# Altium PCB PCB LV.PcbDoc
Units mm, origin at the board's own origin, x right, y up, seen from the top; angles counter-clockwise.
Board outline 41.28 x 38.57 mm, 4 copper layers (L1 (Signal), L2 (GND), L3 (GND), L4 (signal)), stack 1.57 mm thick; 35 components, 27 nets, 172 pads, 140 vias.
Unrouted connection lines stored in the file: 2.
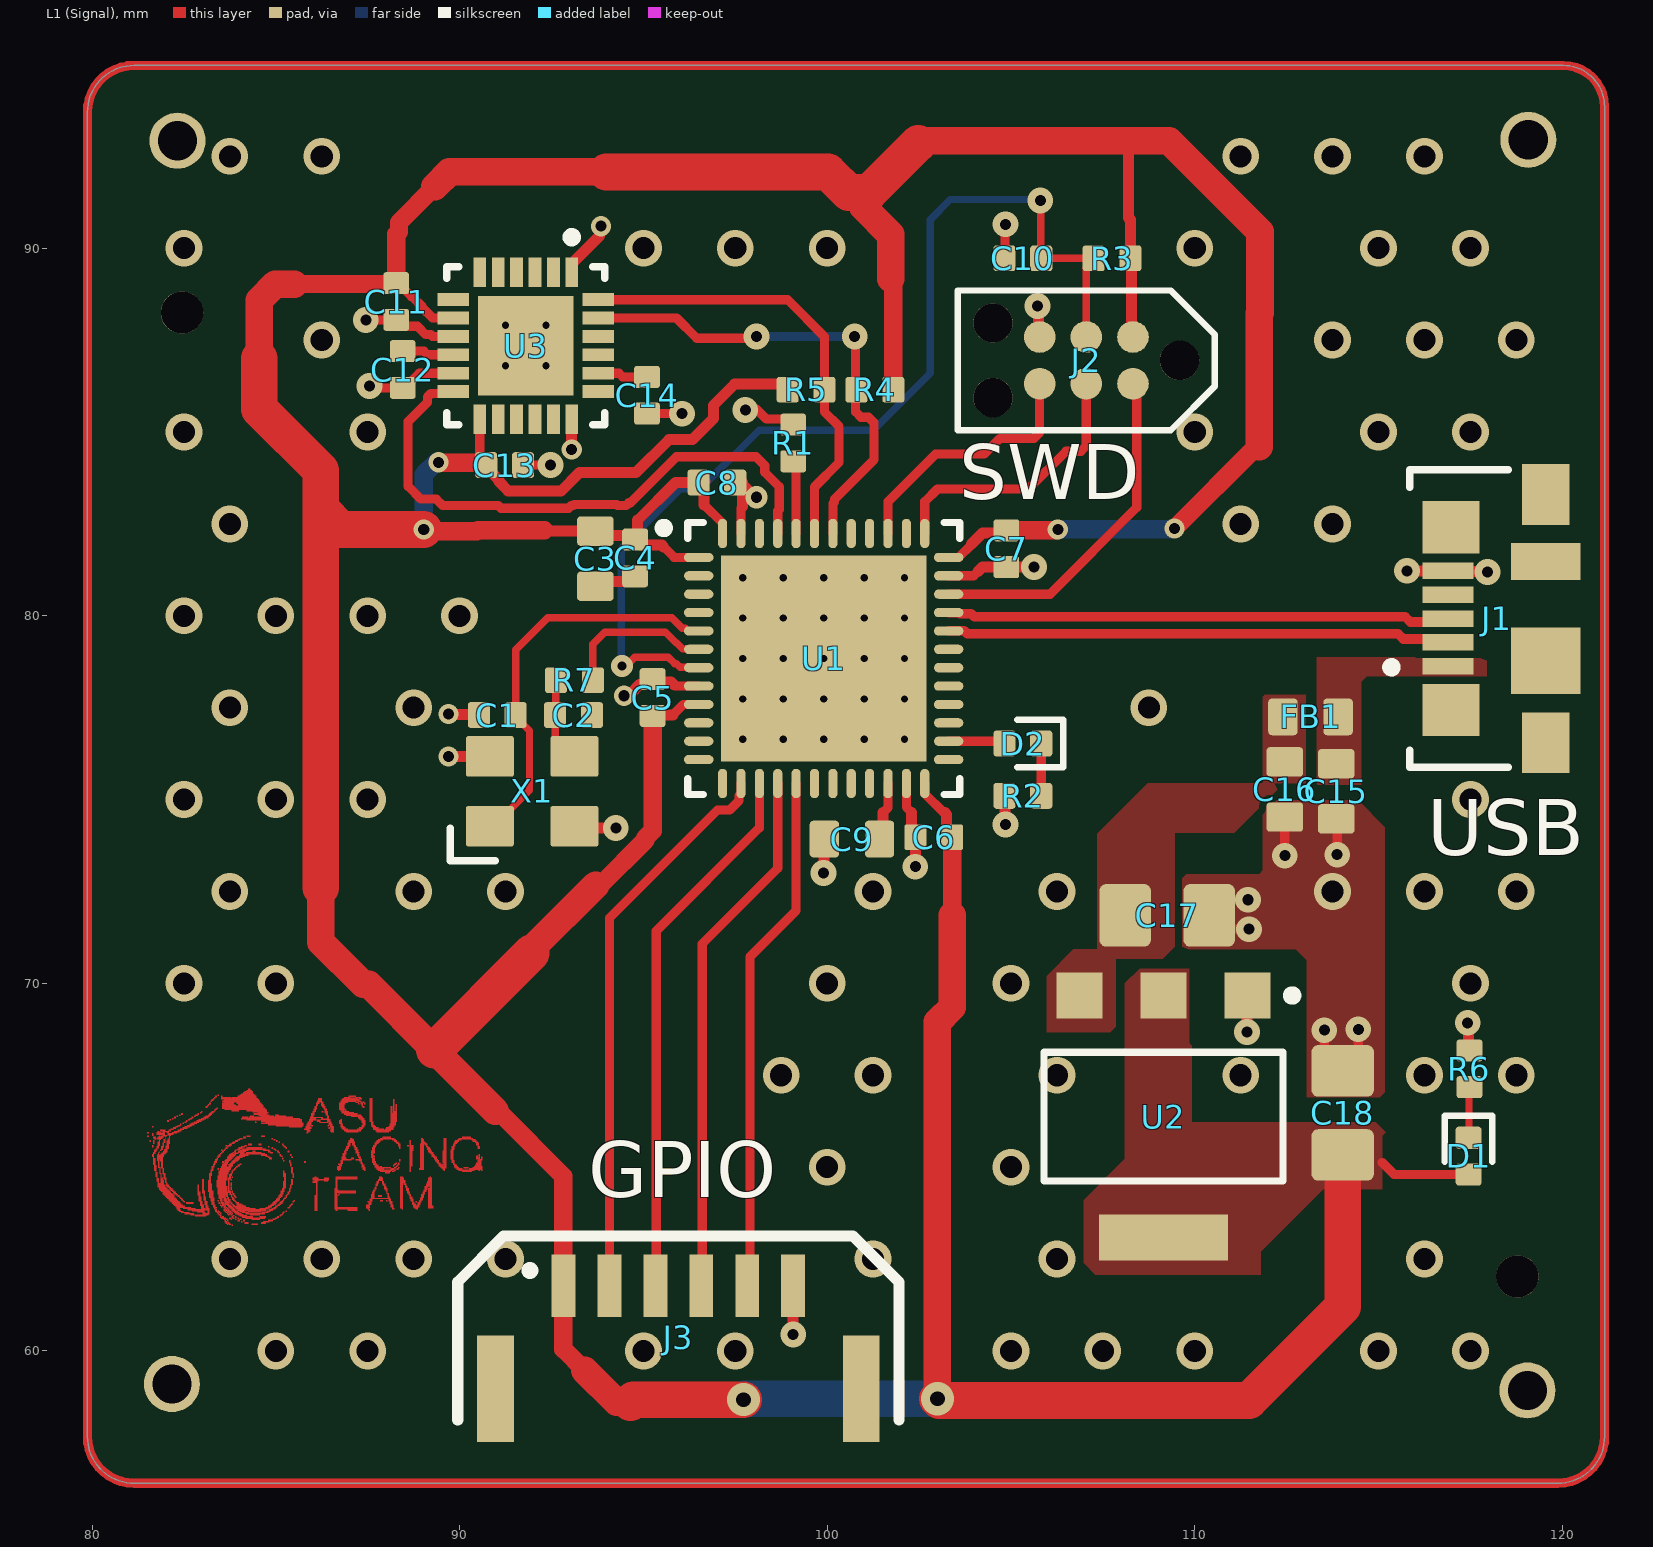
[diagram p0: L1 (Signal) view]
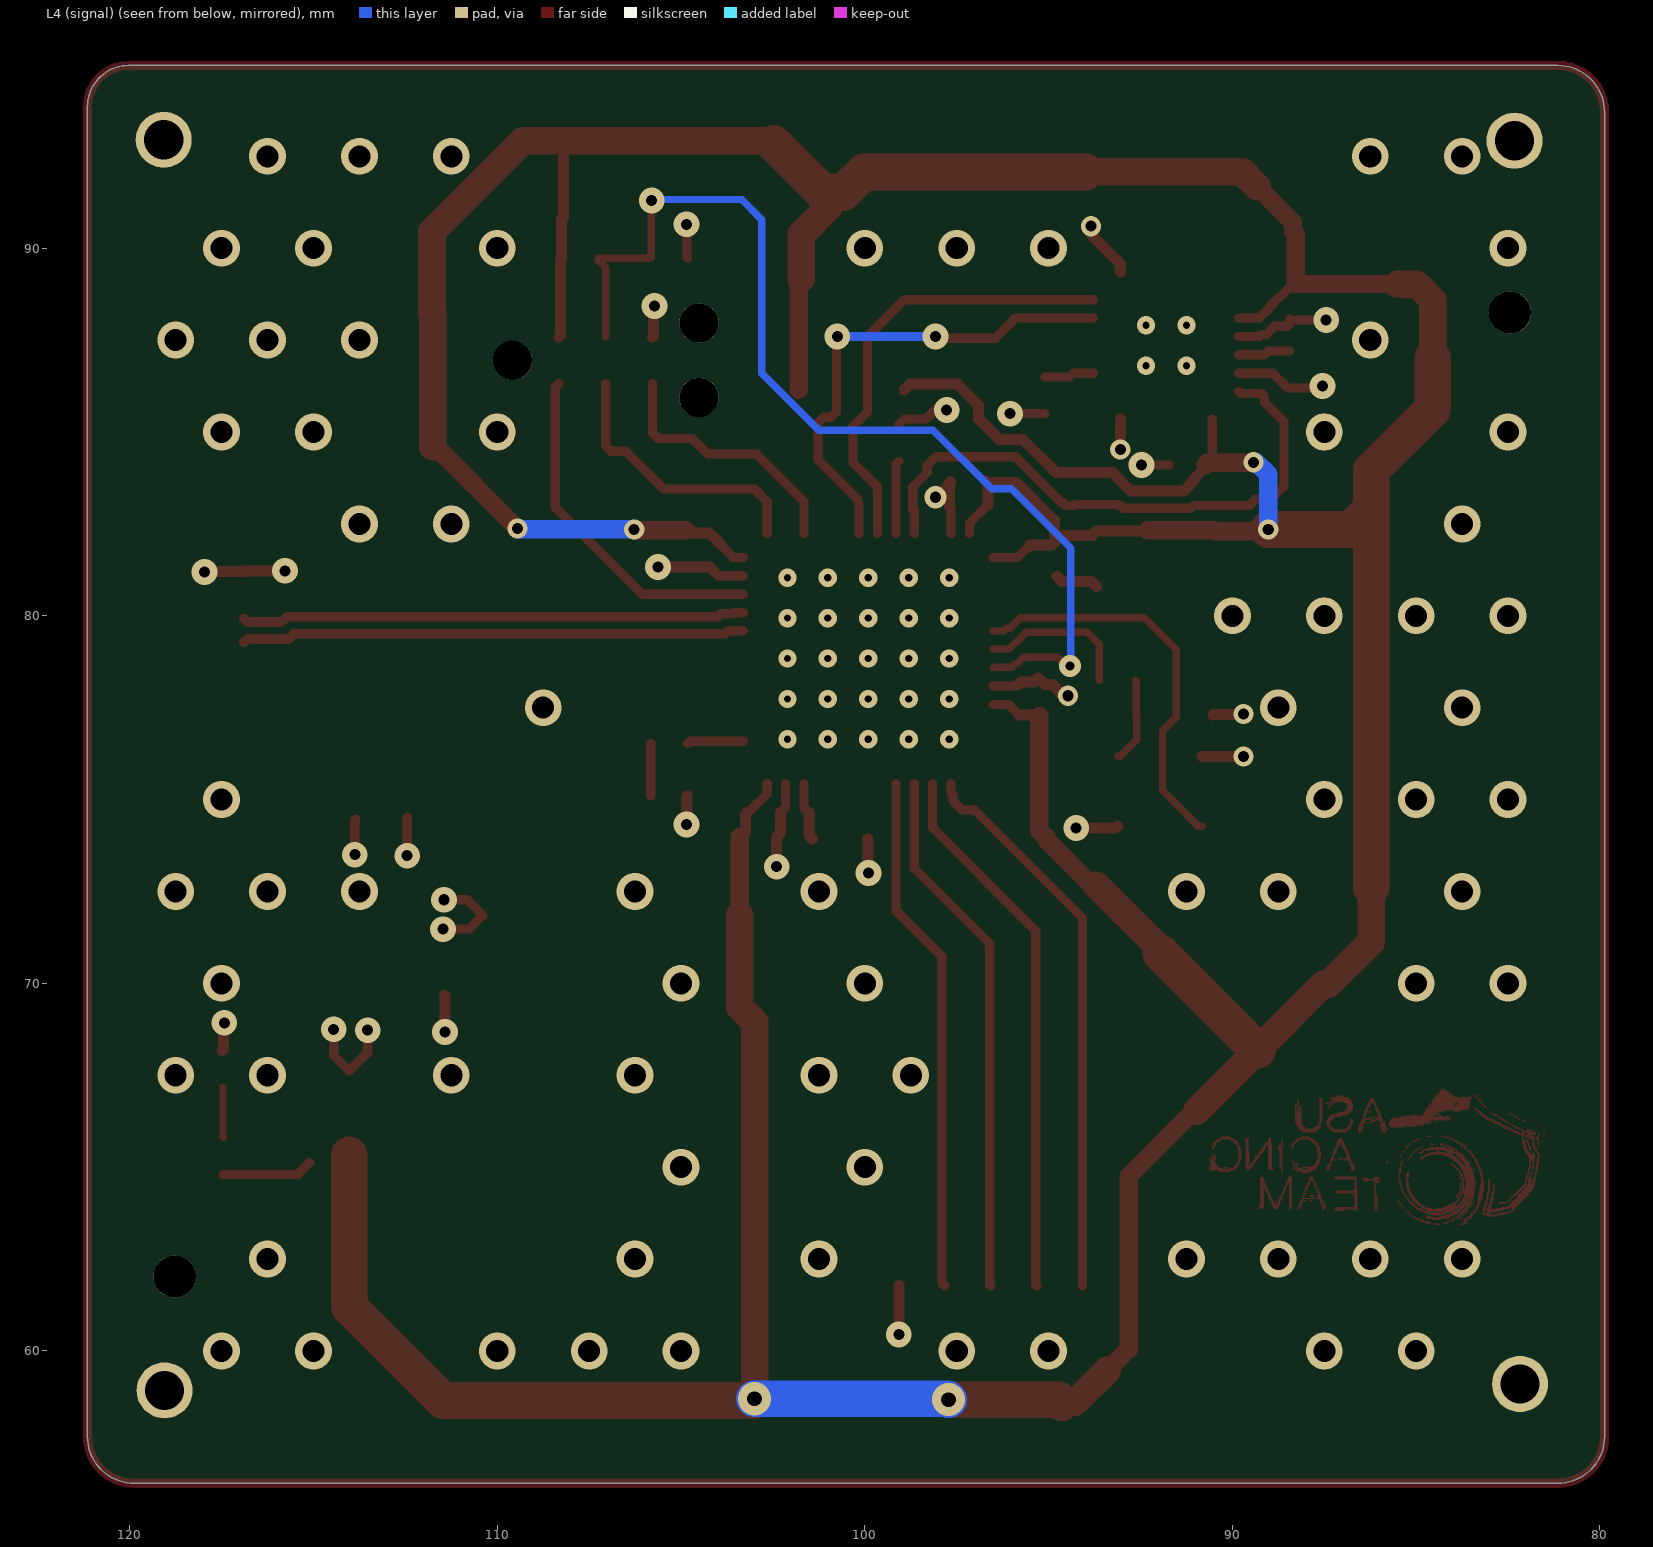
[diagram p1: L4 (signal) view, seen from below]
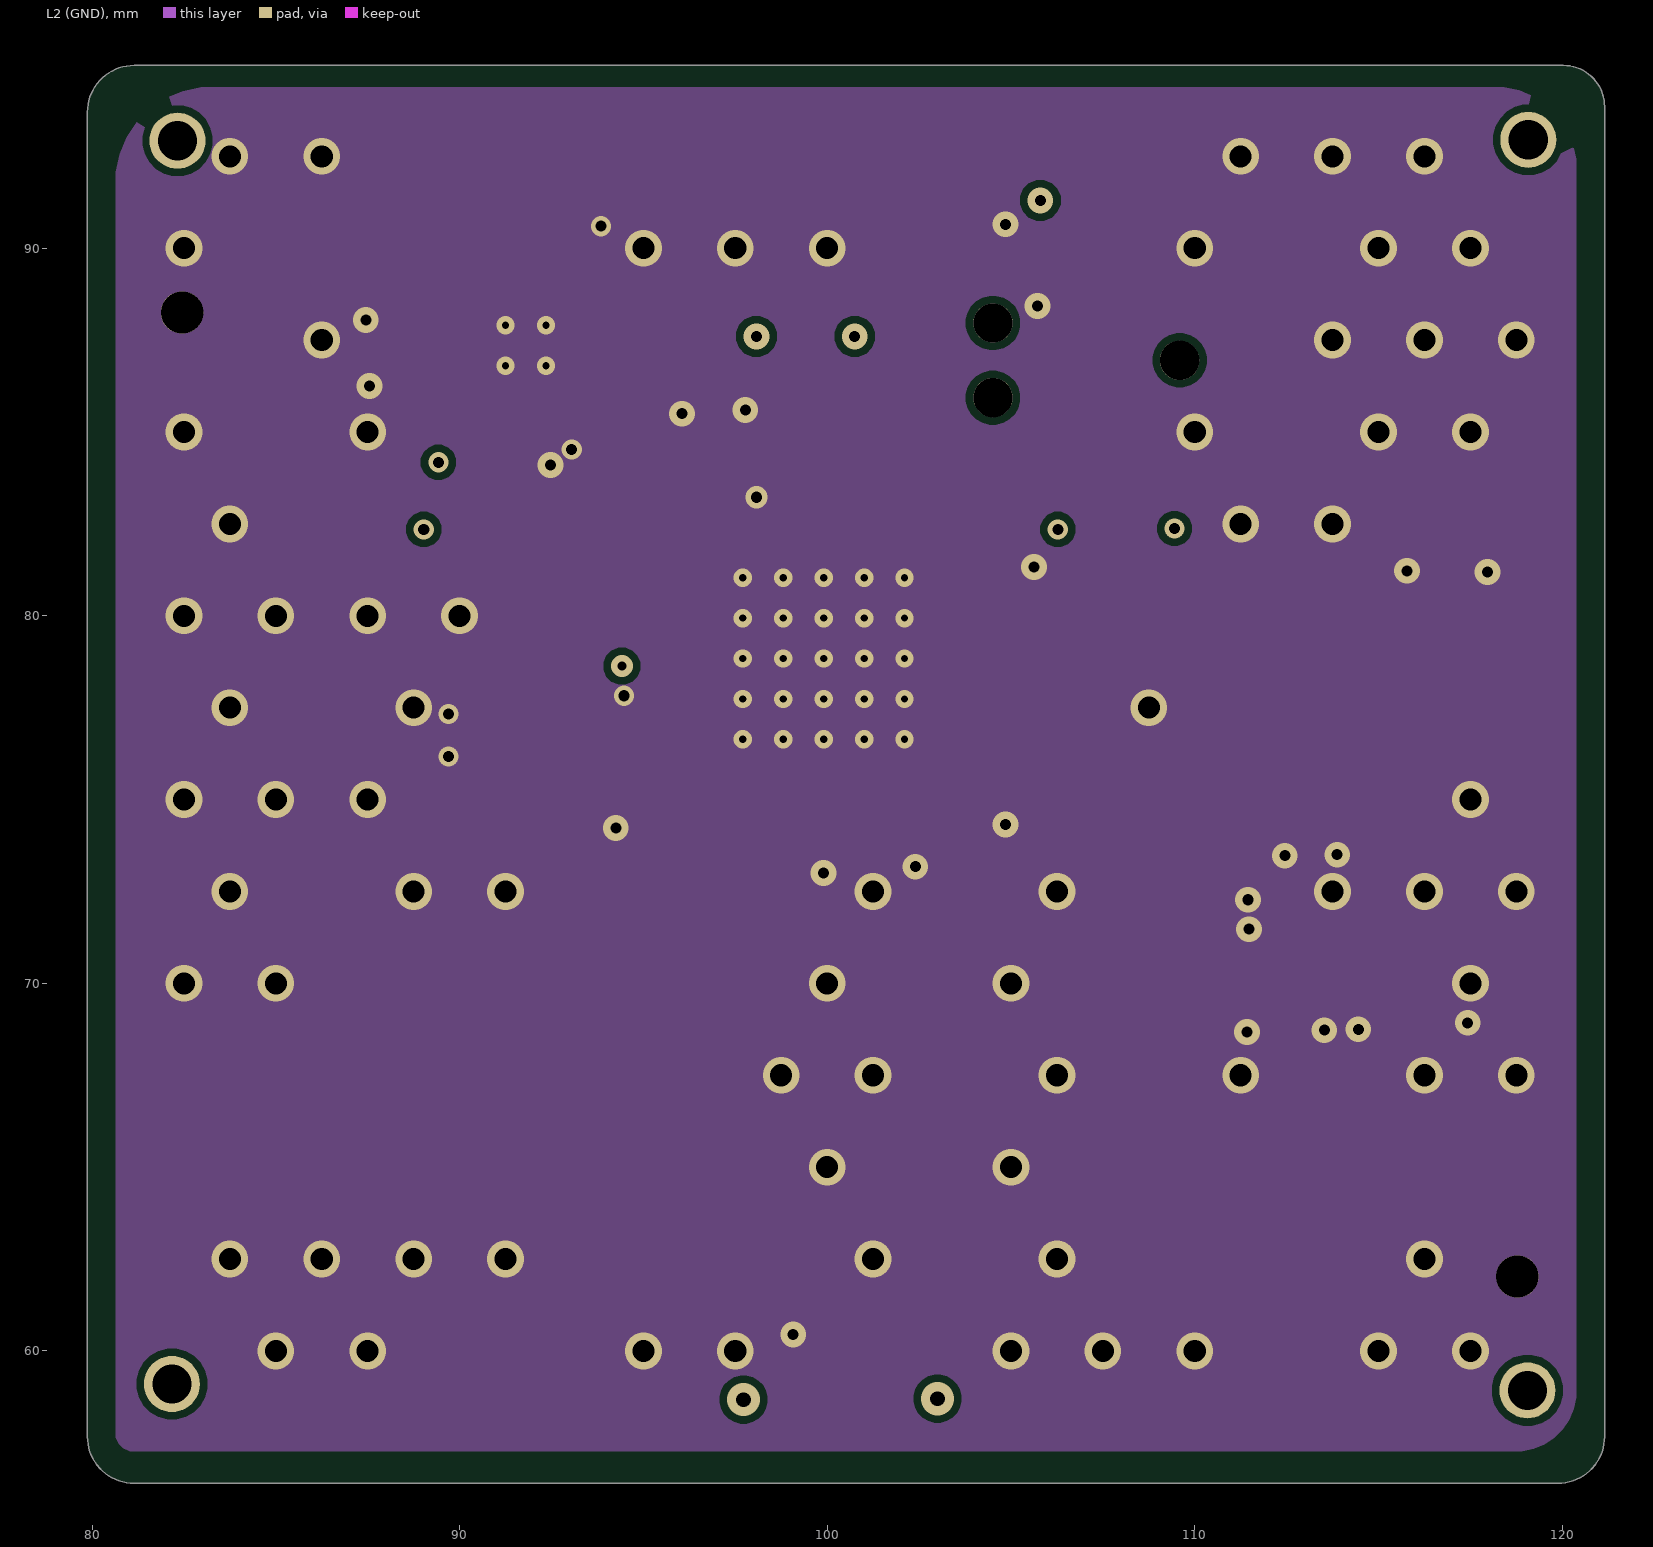
[diagram p2: L2 (GND)]
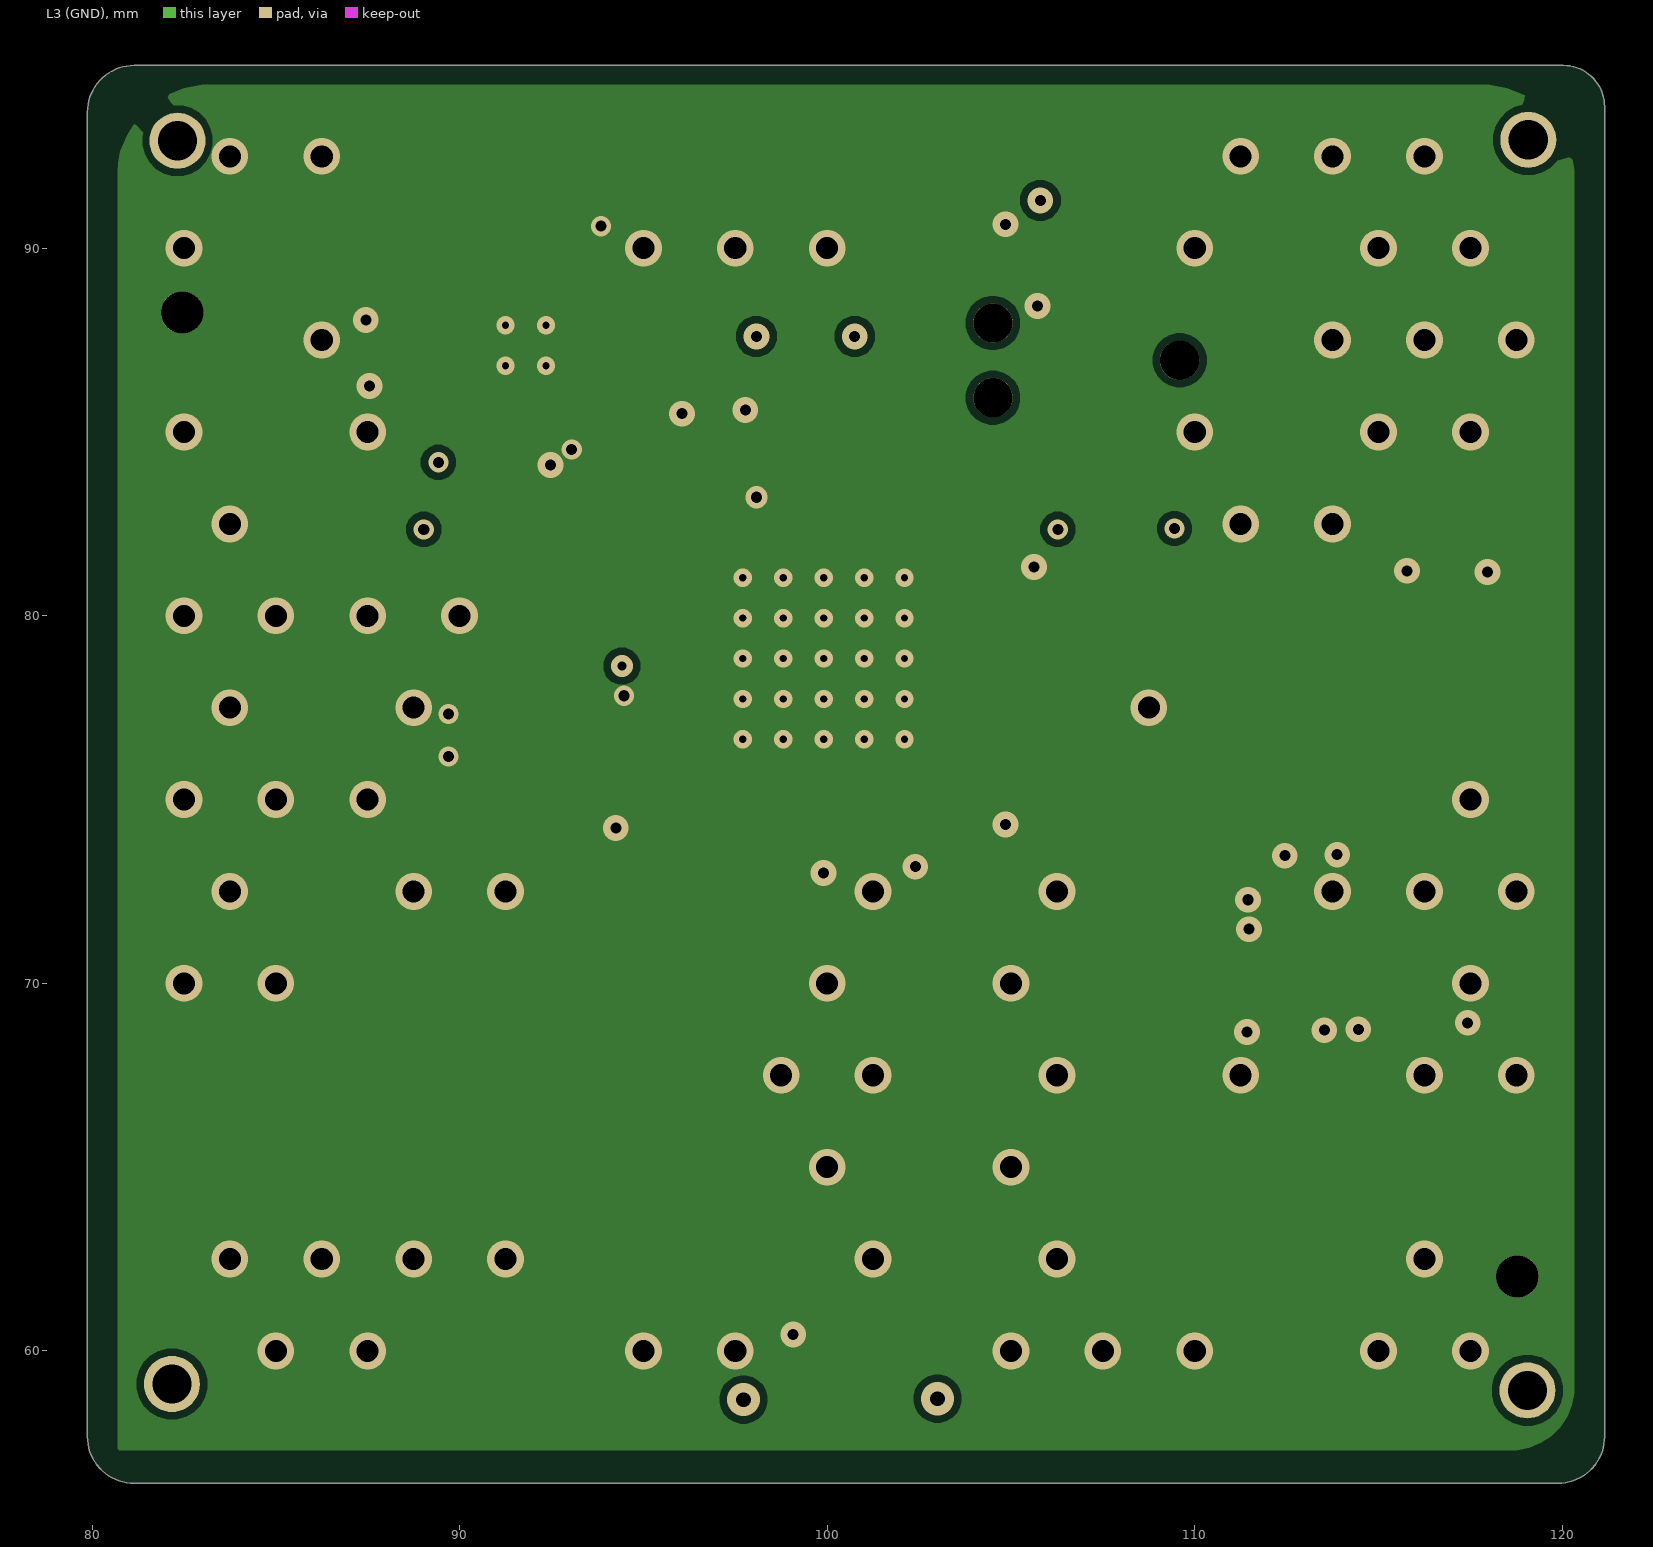
[diagram p3: L3 (GND)]
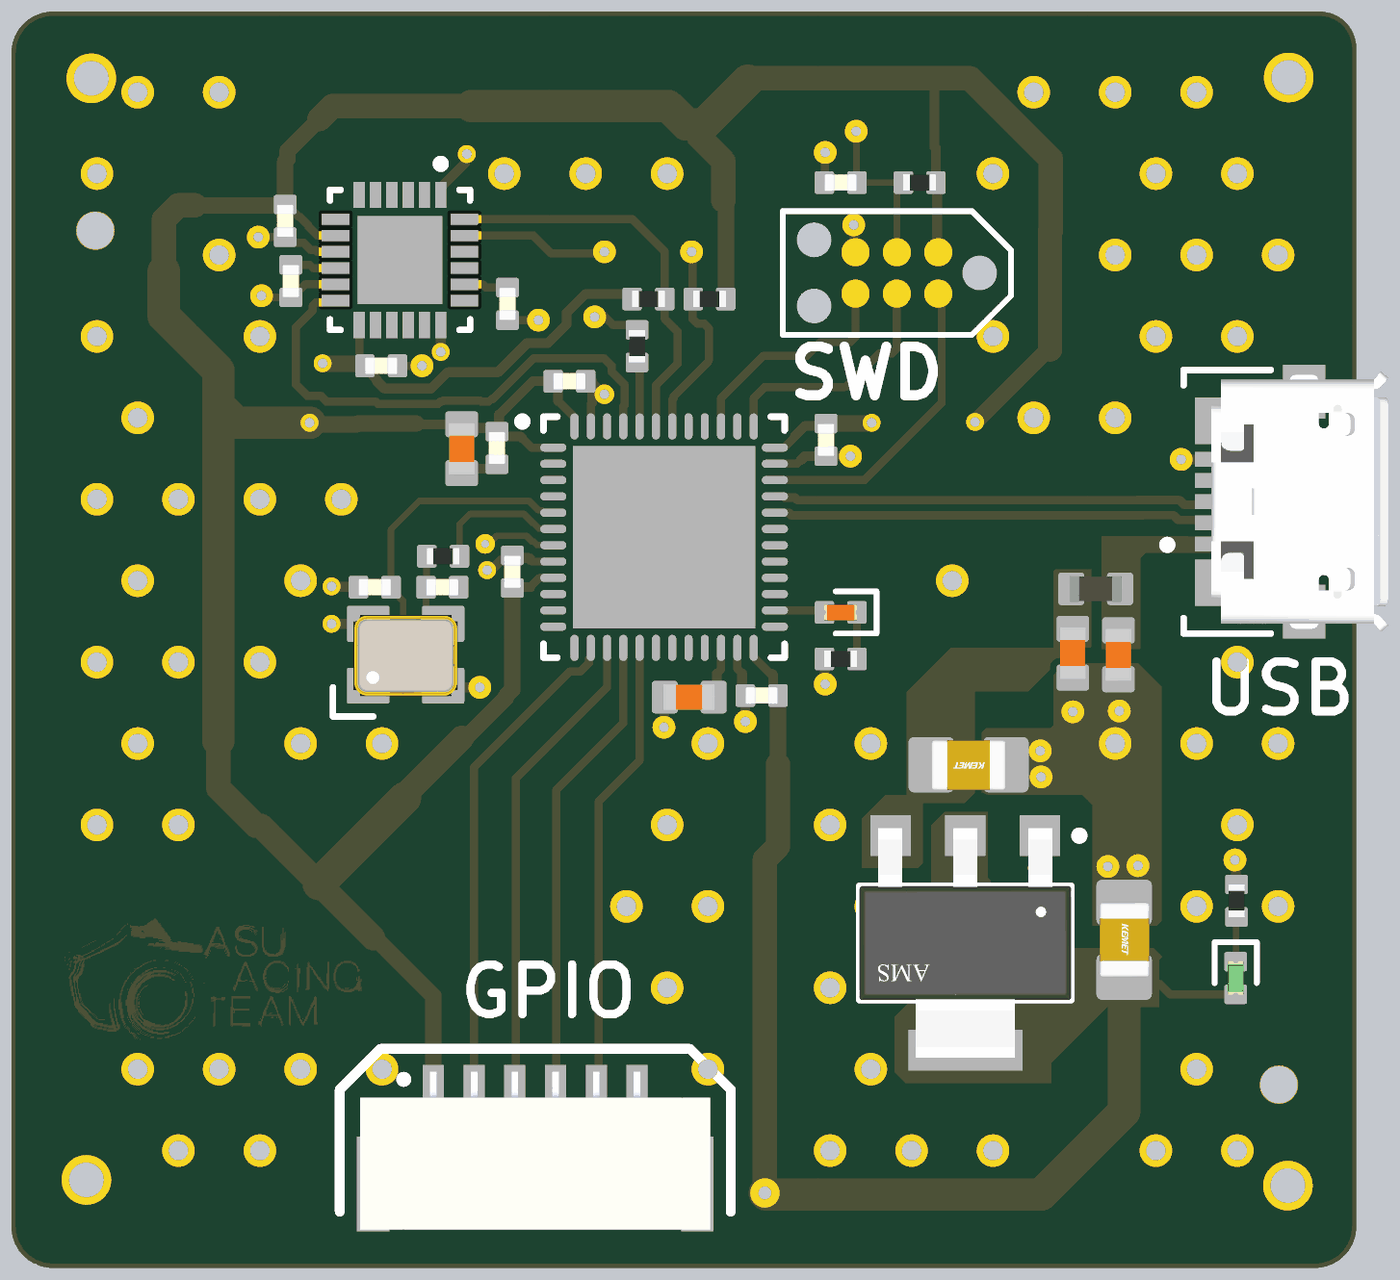
[diagram p4: 3D render of the assembled board from above, using the file's embedded part models]

## Layer stack, top to bottom
Top Solder: solder mask 0.0254, SM-001, Dk 4
L1 (Signal): signal copper 0.035
Dielectric 1: prepreg 0.2, PP-017, Dk 4.6
L2 (GND): signal copper 0.0175
Dielectric 3: core 1.065, Core-039, Dk 4.6
L3 (GND): signal copper 0.0175
Dielectric 5: prepreg 0.2, PP-017, Dk 4.6
L4 (signal): signal copper 0.035
Bottom Solder: solder mask 0.0254, SM-001, Dk 4

## Board outline
79.875,57.67 ccw(c81.145,57.67) 81.145,56.4 119.88,56.4 ccw(c119.88,57.67) 121.15,57.67 121.15,93.85 ccw(c120.027,93.85) 120.027,94.973 81.145,94.973 ccw(c81.145,93.703) 79.875,93.703

## Design rules (kind name [scope] priority, off if disabled: settings)
Clearance [All] p1: gap=0.2 ignorepadtopadclearanceinfootprint=FALSE
DiffPairsRouting [All] p1: maxlimit=0.254 minlimit=0.203 mostfreqgap=0.254 toplayer_maxgap=0.203 toplayer_prefgap=0.203 toplayer_minwidth=0.26 toplayer_maxwidth=0.26 toplayer_prefwidth=0.26 bottomlayer_maxgap=0.203 bottomlayer_prefgap=0.203 bottomlayer_minwidth=0.26 bottomlayer_maxwidth=0.26 bottomlayer_prefwidth=0.26 impedanceprofiledriven=TRUE impedanceprofileid={1E24B15E-7071-4784-B288-BCCDF5F66E81} impedanceprofilevalue=90.000000 maxuncoupledlength=12.7
PolygonConnect [All] p1: connectstyle=Direct reliefconductorwidth=0.254 reliefentries=4 polygonreliefangle="90 Angle" airgapwidth=0.254
RoutingVias [All] p1: holewidth=0.3 width=0.7 viastyle="Through Hole" minholewidth=0.25 minwidth=0.55 maxholewidth=0.4 maxwidth=0.9
SolderMaskExpansion [All] p1: expansion=0 istentingtop=FALSE
SupplyNets "Schematic Supply Nets_3" [InNet('VBUS')] p1: voltage=0.000
SupplyNets "Schematic Supply Nets_2" [InNet('+3V3')] p2: voltage=0.000
SupplyNets "Schematic Supply Nets_1" [InNet('GND')] p3: voltage=0.000
SupplyNets "Schematic Supply Nets" [InNet('+5')] p4: voltage=0.000
UnRoutedNet [All] p1: checkbadconnections=TRUE
Width [All] p1: maxlimit=1 minlimit=0.2 preferedwidth=0.3 midlayer1_minwidth=0.254 midlayer1_maxwidth=0.254 midlayer1_prefwidth=0.254 midlayer2_minwidth=0.254 midlayer2_maxwidth=0.254 midlayer2_prefwidth=0.254 minimp=50.000000 maximp=50.000000 favimp=50.000000
28 further rules are at their usual default settings.

## Classes and differential pairs
differential pair class USB_PAIR: USB_D
differential pair USB_D: +USB_D_P -USB_D_N

## Components (designator, comment, footprint, x,y, rotation, side; value= is the part's Value field where it differs from the comment)
C1 "10p" CAP_0402 91.025,77.3 r0 top
C2 "10p" CAP_0402 93.1,77.3 r180 top
C3 "2.2u" CAP_0603 93.694,81.553 r90 top
C4 "100n" CAP_0402 94.775,81.575 r90 top
C5 "100n" CAP_0402 95.25,77.775 r270 top
C6 "100n" CAP_0402 102.9,73.975 r0 top
C7 "100n" CAP_0402 104.875,81.825 r90 top
C8 "100n" CAP_0402 97,83.625 r180 top
C9 "2u2" CAP_0603 100.675,73.925 r0 top
C10 "100n" CAP_0402 105.325,89.725 r0 top
C11 "100n" CAP_0402 88.275,88.55 r90 top
C12 "100n" CAP_0402 88.45,86.7 r90 top
C13 "10n" CAP_0402 91.225,84.1 r180 top
C14 "2n2" CAP_0402 95.1,86 r90 top
C15 "2.2u" CAP_0603 113.85,75.225 r90 top
C16 "2.2u" CAP_0603 112.45,75.275 r90 top
C17 "22u" CAP_0805 109.25,71.85 r180 top
C18 "22u" CAP_0805 114.025,66.475 r270 top
D1 "GREEN" LED_0402_GREEN 117.45,65.3 r90 top
D2 "RED" LED_0402_RED 105.325,76.525 r0 top
FB1 "120R" FB_0603 113.15,77.25 r180 top
J1 "473460001" FP-473460001-MFG 119.2,79.925 r90 top
J2 "TC2030-NL" TC2030-NL-FP 107.05,86.95 r180 top
J3 "SM06B-GHS-TB" SM06B-GHS-TB 95.95,60.375 r0 top
R1 "10k" RES_0402 99.075,84.7 r270 top
R2 "1k" RES_0402 105.325,75.1 r180 top
R3 "10k" RES_0402 107.75,89.725 r0 top
R4 "1k" RES_0402 101.3,86.15 r180 top
R5 "1k" RES_0402 99.425,86.15 r0 top
R6 "1k" RES_0402 117.475,67.675 r270 top
R7 "0R" RES_0402 93.125,78.25 r180 top
U1 "STM32F411CEU6" STM-UFQFPN48_L 99.905,78.838 r0 top
U2 "AMS1117-3.3" FP-AMS1117-IPC_C 109.15,66.375 r270 top
U3 "MPU-6050" IS-QFN-24_V 91.8,87.35 r270 top
X1 "24MHz" XTAL_3225 91.975,75.225 r0 top

## Footprints (in the part's own frame and the unit in brackets; to place one, negate y for a bottom-side part, rotate by r counter-clockwise, add the part's x,y. Pads: shape width x height; smd on the part's side, far side on the other; paste and mask are expansions set on the pad)
CAP_0402 [mm]
  rrect25% 0.6x0.7 smd: 1(-0.5,0) 2(0.5,0)
  body extent -0.5,-0.26 0.5,0.26, height 0.37
CAP_0603 [mm]
  rrect25% 0.8x1 smd: 1(-0.75,0) 2(0.75,0)
  body extent -0.8,-0.4 0.8,0.4, height 0.51
CAP_0805 [mm]
  rrect25% 1.4x1.7 smd: 1(-1.143,0) 2(1.143,0)
  body extent -1.15,-0.76 1.15,0.79, height 1.01
FB_0603 [mm]
  rrect25% 0.8x1 smd: 1(-0.75,0) 2(0.75,0)
  body extent -0.8,-0.4 0.8,0.4, height 0.81
FP-473460001-MFG [mm]
  rect 0.45x1.38 smd paste+0 mask+0: 1(-1.3,2.31) 2(-0.65,2.31) 3(0,2.31) 4(0.65,2.31) 5(1.3,2.31)
  rect 1.425x1.55 smd paste+0 mask+0: 6(-2.488,2.225) 7(2.488,2.225)
  rect 1.65x1.3 smd paste+0 mask+0: 8(-3.375,-0.35) 11(3.375,-0.35)
  rect 1.8x1.9 smd paste+0 mask+0: 9(-1.15,-0.35)
  rect 1x1.9 smd paste+0 mask+0: 10(1.55,-0.35)
  silkscreen extent -4.05,0.67 4.05,3.97, body extent -4.3,-2.48 4.3,3.45, height 0.25
FP-AMS1117-IPC_C [mm]
  rect 1.25x1.25 smd paste+0 mask+0: 1(-3.295,2.29) 2(-3.295,0) 3(-3.295,-2.29)
  rect 1.25x3.5 smd paste+0 mask+0: 4(3.295,0)
  silkscreen extent -3.42,-3.25 1.75,3.63, body extent -3.9,-3.35 3.9,3.35, height 0.25
IS-QFN-24_V [mm] "QFN, 24-Leads, Body 4x4mm, Pitch 0.5mm, Thermal Pad 2.7x2.6mm"
  rect 0.8x0.35 smd: 1(-2,1.25) 2(-2,0.75) 3(-2,0.25) 4(-2,-0.25) 5(-2,-0.75) 6(-2,-1.25) 13(2,-1.25) 14(2,-0.75) 15(2,-0.25) 16(2,0.25) 17(2,0.75) 18(2,1.25)
  rect 0.35x0.85 smd mask+0.102: 7(-1.25,-1.975) 8(-0.75,-1.975) 9(-0.25,-1.975) 10(0.25,-1.975) 11(0.75,-1.975) 12(1.25,-1.975) 19(1.25,1.975) 20(0.75,1.975) 21(0.25,1.975) 22(-0.25,1.975) 23(-0.75,1.975) 24(-1.25,1.975)
  rect 2.7x2.6 smd: 25(0,0)
  silkscreen extent -3.07,-2.15 2.15,2.15, body extent -2,-2 2,2, height 0.95
LED_0402_GREEN [mm]
  rrect25% 0.6x0.7 smd: A(-0.5,0) K(0.5,0)
  silkscreen extent -0.15,-0.65 1.1,0.65, body extent -0.51,-0.25 0.51,0.25, height 0.45
LED_0402_RED [mm]
  rrect25% 0.6x0.7 smd: A(-0.5,0) K(0.5,0)
  silkscreen extent -0.15,-0.65 1.1,0.65, body extent -0.51,-0.25 0.51,0.25, height 0.45
RES_0402 [mm]
  rrect25% 0.6x0.7 smd: 1(-0.5,0) 2(0.5,0)
  body extent -0.5,-0.25 0.5,0.25, height 0.3
SM06B-GHS-TB [mm]
  rect 0.65x1.7 smd: 1(-3.125,1.4) 2(-1.875,1.4) 3(-0.625,1.4) 4(0.625,1.4) 5(1.875,1.4) 6(3.125,1.4)
  rect 1x2.9 smd: ""(-4.975,-1.4) ""(4.975,-1.4)
  silkscreen extent -6,-2.25 6,2.75, body extent -5.38,-2.8 5.38,2.05, height 4.26
STM-UFQFPN48_L [mm] "QFN, 48-Leads, Body 7.1x7.1mm, Pitch 0.5mm, Thermal Pad 5.6x5.6mm, IPC High Density"
  oval 0.8x0.25 smd: 1(-3.4,2.75) 2(-3.4,2.25) 3(-3.4,1.75) 4(-3.4,1.25) 5(-3.4,0.75) 6(-3.4,0.25) 7(-3.4,-0.25) 8(-3.4,-0.75) 9(-3.4,-1.25) 10(-3.4,-1.75) 11(-3.4,-2.25) 12(-3.4,-2.75) 25(3.4,-2.75) 26(3.4,-2.25) 27(3.4,-1.75) 28(3.4,-1.25) 29(3.4,-0.75) 30(3.4,-0.25) 31(3.4,0.25) 32(3.4,0.75) 33(3.4,1.25) 34(3.4,1.75) 35(3.4,2.25) 36(3.4,2.75)
  oval 0.25x0.8 smd: 13(-2.75,-3.4) 14(-2.25,-3.4) 15(-1.75,-3.4) 16(-1.25,-3.4) 17(-0.75,-3.4) 18(-0.25,-3.4) 19(0.25,-3.4) 20(0.75,-3.4) 21(1.25,-3.4) 22(1.75,-3.4) 23(2.25,-3.4) 24(2.75,-3.4) 37(2.75,3.4) 38(2.25,3.4) 39(1.75,3.4) 40(1.25,3.4) 41(0.75,3.4) 42(0.25,3.4) 43(-0.25,3.4) 44(-0.75,3.4) 45(-1.25,3.4) 46(-1.75,3.4) 47(-2.25,3.4) 48(-2.75,3.4)
  rect 5.6x5.6 smd: 49(0,0)
  silkscreen extent -4.47,-3.7 3.7,3.7, body extent -3.55,-3.55 3.55,3.55, height 0.6
TC2030-NL-FP [mil]
  round 33.98 smd paste-16.99: 1(-50,-25) 2(-50,25) 3(0,-25) 4(0,25) 5(50,-25) 6(50,25)
  round 42.01 hole 42.01 unplated: MH(-100,0) MH(100,-40) MH(100,40)
  silkscreen extent -138,-75 138,75
XTAL_3225 [mm]
  rrect10% 1.3x1.1 smd: 1(-1.15,-0.95) 2(1.15,-0.95) 3(1.15,0.95) 4(-1.15,0.95)
  silkscreen extent -2.23,-1.89 -1,-1, body extent -1.6,-1.28 1.6,1.22, height 0.61

## Part data
C1 C2 C4 C5 C6 C7 C8 C10 C11 C12 C13 C14: library part CAP_0402, "Capacitor SMD 0402"
C3 C9 C15 C16: library part CAP_0603, "Capacitor SMD 0603"
C17 C18: library part CAP_0805, "Capacitor SMD 0805"
D1: library part LED_0402_GREEN, "LED 0402 GREEN SMD"
D2: library part LED_0402_RED, "LED 0402 RED SMD"
FB1: library part FB_0603, "Ferrite Bead SMD 0603"
J1: library part CMP-2000-05246-2, "CONN RCPT USB2.0 MICRO B SMD R/A", Current Rating=1.8A, Manufacturer=Molex, Package=0, Temperature="-30°C to +85°C", Temperature Range High=+85°C, Temperature Range Low=-30°C, Voltage Rating=30V, Automotive=No, Category=Conn, ComponentLink2Description=Datasheet, ComponentLink2URL=https://www.molex.com/webdocs/datasheets/pdf/en-us/0473460001_IO_CONNECTORS.pdf, Conn Orientation="Right Angle", Contact Material=Gold,Nickel, Device Class L1=Connectors, Device Class L2="USB Connectors", Device Class L3=unset, Digikey Description="CONN RCPT USB2.0 MICRO B SMD R/A", Footprint Url=https://www.molex.com/pdm_docs/sd/473460001_sd.pdf, Height=2.945mm, Is Female=yes, Lead Free=Yes, Manufacturer Part Number=473460001, Number Of Contacts=5, Octopart=https://octopart.com/47346-0001-molex-7164928, Pitch=0.65mm, RoHS=TRUE, Shielding=true, Usb Standard="USB 2.0"
J2: "Tag-Connect No-Solder SWD Debug Connector (No Legs) DO NOT PLACE", Manufacturer=Tag-Connect, Manufacturer Part Number=TC2030-NL-FP
J3: "Header Connector 6 Position 1.25MM Pitch SMD Horizontal JST GH", Manufacturer=JST, Manufacturer Part Number=SM06B-GHS-TB
R1 R2 R3 R4 R5 R6 R7: library part RES_0402, "Resistor SMD 0402"
U1: library part CMP-0243-00165-1, "ARM Cortex-M4 32-bit MCU+FPU, 512 KB Flash, 128 KB RAM, 36 I/Os, 48-Pin UFQFPN, -40 to 85 degC, Tray", I/Os (High Current)=36, Operating Frequency(F) (Processor speed) (MHz)=100, Package Description=UFQFPN48, Package Reference="48-Pin Ultra Thin Fine Pitch Quad Flat No-Lead, 7 x 7 x 0.6 mm Body, 0.5 mm Pitch, Exposed Pad", Supply Voltage(Vcc) min (V)=1.7, ComponentLink1Description="Manufacturer URL", ComponentLink1URL=http://www.st.com/, ComponentLink2Description=Datasheet, ComponentLink2URL=http://www.st.com/st-web-ui/static/active/en/resource/technical/document/datasheet/DM00115249.pdf, Core="ARM Cortex-M4", DatasheetVersion="Rev. 6", FLASH Size (Prog) (kB)=512, Internal RAM Size (kB)=128, Mounting Technology="Surface Mount", Packing=Tray
U2: library part CMP-209535-000001-1, "LDO Voltage Regulators 1A, 3.3V", Dropout Voltage=1.1V, Manufacturer="Advanced Monolithic Systems", Max Junction Temp=+125°C, Max Power Dissipation=1.2W, Max Supply Voltage=15V, Nominal Supply Current=5mA, Output Current=1A, Output Voltage=3.3V, Package=AMS1117, Temperature="-40°C to +125°C", Temperature Range Low=-40°C, Automotive=No, Category=IC, ComponentLink2Description=Datasheet, ComponentLink2URL=http://www.advanced-monolithic.com/pdf/ds1117.pdf, Device Class L1="Integrated Circuits (ICs)", Device Class L2="Power Management ICs", Device Class L3="Voltage Regulators - Linear", Height=1.8mm, Ipc Land Pattern Name=SOT229P700X180-4, Lead Free=Yes, Manufacturer Part Number=AMS1117-3.3, Number Of Outputs=1, Octopart=https://octopart.com/ams1117-3.3-advanced+monolithic+systems-25899300, Output Type=Fixed, RoHS=TRUE, Standoff Height=0.64mm, Temperature Range High=+125°C
U3: library part CMP-1753-00002-2, "3-Axis Gyroscope, Accelerometer and a Digital Motion Processor(TM) (DMP), 2.375 to 3.46 V, -40 to 85 degC, 24-Pin QFN, RoHS, Tape and Reel", Manufacturer=InvenSense, Standard Package=5,000, Category=Sensors,Transducers, Datasheet URL=http://datasheet.octopart.com/MPU-6050-InvenSense-datasheet-14421344.pdf, Datasheet Version="Rev. 3.3, 05/2012", Dynamic Catalog=MPU-6000™Series, Family=Multifunction, Featured Product=MPU-60506-Axis,IntegratedI²CSolution, Manufacturer URL=http://www.invensense.com/, Online Catalog=MPU-6000™Series, Other Names="1428-1007-2 / MPU6050", Output Type=Digital, Sensor Type=MotionTracking, Unit PriceUSD=Digital
X1: library part TSX-3225_24.0000MF15X-AC, "Crystal SMD 24MHz 10PPM 7pF 3225", Manufacturer=Epson, Manufacturer Part Number="TSX-3225 24.0000MF15X-AC"

## Free pads (board coordinates)
  round 1.524 hole 1.067: MH(82.325,92.925) MH4(119.075,92.95) MH5(119.05,58.925) MH6(82.175,59.1)
  round 1.152 hole 1.152: MH7(118.775,62.025) TH(82.45,88.25)

## Via types
v1: diameter 1, hole 0.6, L1 (Signal) to L4 (signal), 72 vias
v2: diameter 0.5, hole 0.2, L1 (Signal) to L4 (signal), 29 vias
v3: diameter 0.7, hole 0.3, L1 (Signal) to L4 (signal), 26 vias
v4: diameter 0.55, hole 0.3, L1 (Signal) to L4 (signal), 9 vias
v5: diameter 0.9, hole 0.4, L1 (Signal) to L4 (signal), 2 vias
v6: diameter 0.6, hole 0.3, L1 (Signal) to L4 (signal), 1 vias
v7: diameter 0.6, hole 0.25, L1 (Signal) to L4 (signal), 1 vias

## Nets (pads, with @x,y where several pads share a name; then routed paths per layer and width w, separated by ;. In a path a pad name is that pad's centre, name@x,y a point inside that pad or via, vN(x,y) a via of type N, cw(c..) or ccw(c..) an arc to the next point about the centre after c; other vN are vias at no path point)
+3V3: C3.2 C4.2 C5.2 C6.2 C7.2 C8.2 C11.2 C13.2 C18.2 D1.A J2.1 J3.1 R3.2 R4.1 R5.1 U1.1 U1.9 U1.24 U1.36 U1.48 U2.2 U2.4 U3.8 U3.13 | length 181.1
  L1 (Signal) w0.25: C11.2@88.325,89.05 88.7,88.675 88.716,88.675 88.991,88.4 88.991,88.375 89.265,88.1 U3.8 ; U3.13 90.55,84.275 C13.2 ; 95.55,81.875 95.837,81.588 U1.1 ; 95.8,77.3 96.088,77.588 U1.9 ; 96.653,83.016 97.155,82.513 U1.48 ; U1.24 102.655,75.163 103.168,74.65 103.2,74.65 ; U1.36 103.58,81.588 103.925,81.932 103.925,81.95 ; 115.1,65.125 115.425,64.8 D1.A
  L1 (Signal) w0.3: C13.2 90.725,84.05 91.075,83.7 91.075,83.649 91.324,83.4 92.126,83.4 92.765,83.4 93.265,83.9 94.803,83.9 95.703,84.8 96.34,84.8 96.913,85.373 96.913,85.727 97.485,86.3 98.775,86.3 R5.1 ; 92.3,82.325 92.322,82.303 C3.2 93.808,82.189 94.801,82.189 94.837,82.225 94.837,82.6 94.847,82.6 95.872,83.625 C8.2 ; C4.2 94.925,81.925 95.5,81.925 95.55,81.875 ; C5.2@95.3,77.3 95.8,77.3 ; 96.653,83.016 96.653,83.628 C8.2@96.675,83.65 ; 103.2,74.65 103.25,74.6 103.25,74.125 C6.2 ; 103.925,81.95 104.225,82.25 104.8,82.25 C7.2 ; 108.15,92.925 108.2,92.875 108.2,90.825 108.25,90.775 R3.2 108.285,89.69 108.285,87.62 J2.1
  L1 (Signal) w0.5: 85.5,89.025 88.25,89.025 C11.2 88.275,90.375 88.35,90.45 88.35,90.7 89.325,91.675 ; v4(89.025,82.35) 89.075,82.3 90.475,82.3 90.5,82.325 92.3,82.325 ; v4(89.425,84.175) 89.435,84.165 90.675,84.165 90.725,84.115 C13.2 ; 90.975,66.525 91.05,66.525 92.825,64.75 J3.1 92.825,60.05 93.4,59.475 ; 93.7,72.675 93.831,72.675 95.05,73.894 95.05,73.95 95.25,74.15 C5.2 ; 101.725,89.175 101.8,89.1 R4.1 ; 103.4,71.85 C6.2 ; C7.2 106.236,82.325 106.261,82.35 v4(106.275,82.35) ; v4(109.45,82.375) 111.675,84.6 111.75,84.6
  L1 (Signal) w0.75: 84.55,87 84.55,88.586 84.989,89.025 85.5,89.025 ; 86.225,72.6 86.225,71.125 87.375,69.975 87.525,69.975 89.313,68.187 90.975,66.525 ; 89.325,91.675 89.725,92.075 94,92.075 ; 91.95,70.825 91.95,70.925 93.7,72.675 ; 93.4,59.475 94.275,58.6 94.65,58.6 ; 100.975,91.125 101.725,90.375 101.725,89.175 ; 102.475,92.85 102.55,92.925 108.15,92.925 109.3,92.925 111.775,90.45 111.775,88.25 111.75,88.225 111.75,84.6 ; v5(103,58.7) 103,68.95 103.4,69.35 103.4,71.85
  L1 (Signal) w1: 84.55,87 84.55,85.625 86.225,83.95 86.225,82.9 ; 86.225,72.6 86.225,82.9 ; v4(89.025,82.35) 86.775,82.35 86.225,82.9 ; 89.313,68.188 91.95,70.825 ; 94,92.075 100.025,92.075 100.588,91.512 101.137,91.512 102.475,92.85 ; 94.65,58.6 94.725,58.675 v5(97.725,58.675) ; v5(103,58.7) 103.05,58.65 111.475,58.65 114.025,61.2 C18.2
  L4 (signal) w0.5: v4(89.025,82.35) 89.025,83.85 89.35,84.175 v4(89.425,84.175) ; v4(106.275,82.35) 109.425,82.35 v4(109.45,82.375)
  L4 (signal) w1: v5(97.725,58.675) 97.75,58.7 v5(103,58.7)
+5: C16.2 C17.2 FB1.2 U2.3
GND: C1.1 C2.1 C3.1 C4.1 C5.1 C6.1 C7.1 C8.1 C9.1 C10.1 C11.1 C12.1 C13.1 C14.1 C15.1 C16.1 C17.1 C18.1 J1.5 J2.5 J3.6 pad.MH7 pad.TH R1.1 R2.2 R6.1 U1.8 U1.23 U1.35 U1.47 U1.49 U2.1 U3.1 U3.9 U3.11 U3.18 U3.25 X1.2 X1.4 | length 39.8
  L1 (Signal) w0.25: v3(87.45,88.05) 87.5,88.05 C11.1 ; v3(87.55,86.25) ccw(c87.6,86.25) 87.6,86.2 C12.1 ; C11.1@88.45,88.075 88.45,87.925 88.5,87.875 88.854,87.875 89.079,87.65 89.215,87.65 89.265,87.6 U3.9 ; C12.1@88.5,86.2 88.9,86.6 U3.11 ; C13.1 v3(92.475,84.1) ; C14.1 v3(96.05,85.5) ; 95.825,78.125 95.862,78.088 U1.8 ; U1.47 97.655,82.93 97.7,82.975 ; v3(97.775,85.6) 97.8,85.625 98.075,85.625 98.35,85.35 98.925,85.35 R1.1 ; U1.23 102.155,74.795 102.3,74.65 ; U1.35 103.988,81.088 104.1,81.2 ; C10.1 104.837,89.737 104.837,90.637 v3(104.85,90.65) ; v3(111.45,72.275) 110.818,72.275 C17.1 110.768,71.475 v3(111.475,71.475) ; v3(112.45,73.475) 112.45,73.575 C16.1 ; v3(113.525,68.725) 113.525,68.118 C18.1 114.45,68.043 v3(114.45,68.75) ; C15.1 113.875,74.45 v3(113.875,73.5)
  L1 (Signal) w0.3: v4(89.7,76.175) X1.4 ; v4(89.7,77.325) 89.713,77.312 90.512,77.312 C1.1 ; v4(93.05,84.525) U3.18 ; U3.1 93.05,89.575 93.802,90.327 93.802,90.552 v4(93.85,90.6) ; X1.2 93.175,74.225 v3(94.25,74.225) ; C3.1 93.83,80.939 94.639,80.939 C4.1 ; v4(94.475,77.825) 94.523,77.873 94.648,77.873 94.9,78.125 95.1,78.125 C5.1 ; C5.1@95.288,78.312 95.4,78.2 95.75,78.2 95.825,78.125 ; C8.1@97.675,83.6 98.05,83.225 v6(98.074,83.225) ; C8.1@97.675,83.65 97.7,83.625 97.7,82.975 ; v3(99.075,60.45) J3.6 ; v3(99.9,73) 99.913,73.013 99.913,73.912 C9.1 ; 102.3,74.65 102.3,74.075 C6.1 v3(102.4,73.175) ; 104.1,81.2 104.225,81.325 C7.1 v3(105.625,81.325) ; R2.2 104.837,75.087 104.837,74.338 v3(104.85,74.325) ; v3(105.725,88.425) 105.752,88.398 105.752,87.612 J2.5 ; v3(111.425,68.675) 111.425,69.655 U2.1 ; v3(115.775,81.225) J1.5 116.906,81.209 117.949,81.209 v3(117.964,81.193) ; v3(117.425,68.925) 117.45,68.9 117.45,68.2 R6.1
  other v1: 85,60 87.5,60 95,60 97.5,60 105,60 107.5,60 110,60 115,60 117.5,60 83.75,62.5 86.25,62.5 88.75,62.5 91.25,62.5 101.25,62.5 106.25,62.5 116.25,62.5 100,65 105,65 98.75,67.5 101.25,67.5 106.25,67.5 111.25,67.5 116.25,67.5 118.75,67.5 82.5,70 85,70 100,70 105,70 117.5,70 83.75,72.5 88.75,72.5 91.25,72.5 101.25,72.5 106.25,72.5 113.75,72.5 116.25,72.5 118.75,72.5 82.5,75 85,75 87.5,75 117.5,75 83.75,77.5 88.75,77.5 108.75,77.5 82.5,80 85,80 87.5,80 90,80 83.75,82.5 111.25,82.5 113.75,82.5 82.5,85 87.5,85 110,85 115,85 117.5,85 86.25,87.5 113.75,87.5 116.25,87.5 118.75,87.5 82.5,90 95,90 97.5,90 100,90 110,90 115,90 117.5,90 83.75,92.5 86.25,92.5 111.25,92.5 113.75,92.5 116.25,92.5
  other v2: 97.705,76.638 98.805,76.638 99.905,76.638 101.005,76.638 102.105,76.638 97.705,77.738 98.805,77.738 99.905,77.738 101.005,77.738 102.105,77.738 97.705,78.838 98.805,78.838 99.905,78.838 101.005,78.838 102.105,78.838 97.705,79.938 98.805,79.938 99.905,79.938 101.005,79.938 102.105,79.938 97.705,81.038 98.805,81.038 99.905,81.038 101.005,81.038 102.105,81.038 91.25,86.8 92.35,86.8 91.25,87.9 92.35,87.9
"IMU CPOUT": C14.2 U3.20 | length 1.4
  L1 (Signal) w0.25: U3.20 94.335,86.6 94.435,86.5 C14.2
"IMU REGOUT": C12.2 U3.10 | length 1.4
  L1 (Signal) w0.25: C12.2 89.029,87.2 89.129,87.1 U3.10
IMU_INT: U1.45 U3.12 | length 16.1
  L1 (Signal) w0.25: U3.12 89.775,86.05 89.221,86.05 89.125,85.954 89.125,85.809 88.6,85.284 88.6,83.525 88.95,83.175 89.367,83.175 89.542,83 91.052,83 91.127,82.925 92.962,82.925 93.037,83 93.09,83 93.118,83.028 94.27,83.028 94.298,83 94.528,83 94.603,83.075 94.65,83.075 95.9,84.325 98.066,84.325 98.302,84.089 98.302,83.907 98.699,83.51 98.699,82.895 98.655,82.852 U1.45
IMU_SCL: R4.2 U1.42 U3.23 | length 13.4
  L1 (Signal) w0.25: U3.23 95.9,88.1 96.45,87.55 98.025,87.55 v3(98.075,87.6) ; U1.42 100.155,83.055 100.2,83.1 100.2,83.175 101.275,84.25 101.275,85.25 101.125,85.4 100.921,85.4 100.775,85.546 100.775,86.125 100.775,87.575 v3(100.75,87.6)
  L4 (signal) w0.25: v3(98.075,87.6) v3(100.75,87.6)
IMU_SDA: R5.2 U1.43 U3.24 | length 12.4
  L1 (Signal) w0.25: U3.24 98.925,88.6 99.925,87.6 R5.2 99.925,85.55 100.325,85.15 100.325,84.175 99.655,83.505 U1.43
"MCU BOOT0": R1.2 U1.44 | length 2
  L1 (Signal) w0.25: R1.2 99.155,84.12 U1.44
"MCU NRST": C10.2 J2.3 R3.1 U1.7 | length 28.5
  L1 (Signal) w0.2: v7(94.415,78.631) 94.523,78.631 94.767,78.875 95.68,78.875 95.855,78.7 95.9,78.7 96.003,78.597 96.496,78.597 U1.7 ; v3(105.8,91.3) 105.812,91.288 105.812,89.738 C10.2 R3.1 107.25,89.675 107.05,89.475 J2.3
  L4 (signal) w0.2: v7(94.415,78.631) 94.4,78.646 94.4,81.844 96.01,83.455 96.549,83.455 98.144,85.05 101.25,85.05 102.8,86.6 102.8,90.775 103.35,91.325 105.75,91.325 105.775,91.3 v3(105.8,91.3)
"MCU OSC IN": C1.2 U1.5 X1.1 | length 11
  L1 (Signal) w0.2: X1.1 90.925,74.275 91.9,75.25 91.9,76.875 91.525,77.25 C1.2 91.525,79.075 92.4,79.95 95.767,79.95 96.054,79.663 96.142,79.663 96.217,79.588 U1.5
"MCU OSC OUT": R7.1 U1.6 | length 4.2
  L1 (Signal) w0.2: R7.1 93.625,79.225 93.95,79.55 95.602,79.55 95.889,79.263 95.903,79.263 96.068,79.097 96.496,79.097 U1.6
"MCU VCAP1": C9.2 U1.22 | length 1.6
  L1 (Signal) w0.25: 101.525,74.65 101.655,74.78 U1.22
  L1 (Signal) w0.3: C9.2 101.525,74.025 101.525,74.65
MCU_LED_A: D2.A U1.26 | length 1.5
  L1 (Signal) w0.25: U1.26 104.762,76.588 D2.A
MCU_LED_C: D2.K R2.1 | length 1.4
  L1 (Signal) w0.25: R2.1 D2.K
MCU_PA4: J3.2 U1.14 | length 15.3
  L1 (Signal) w0.25: J3.2 94.075,71.775 97.013,74.713 97.342,74.713 97.605,74.977 97.605,75.113 97.655,75.163 U1.14
MCU_PA5: J3.3 U1.15 | length 14.8
  L1 (Signal) w0.25: J3.3 95.35,61.8 95.35,71.425 98.155,74.23 U1.15
MCU_PA6: J3.4 U1.16 | length 14.5
  L1 (Signal) w0.25: J3.4 96.6,61.8 96.6,71.075 98.655,73.13 U1.16
MCU_PA7: J3.5 U1.17 | length 14.2
  L1 (Signal) w0.25: J3.5 97.9,61.85 97.9,70.725 99.155,71.98 U1.17
MCU_SWCLK: J2.4 U1.37 | length 7.6
  L1 (Signal) w0.25: U1.37 102.655,83.105 103,83.45 105.475,83.45 106.5,84.475 106.904,84.475 107.05,84.621 J2.4
MCU_SWDIO: J2.2 U1.34 | length 9.5
  L1 (Signal) w0.25: U1.34 106.063,80.588 108.425,82.95 108.425,86.21 J2.2
MCU_SWO: J2.6 U1.39 | length 7.1
  L1 (Signal) w0.25: U1.39 101.655,83.105 102.95,84.4 104.275,84.4 104.7,84.825 105.625,84.825 105.78,84.98 J2.6
NetD1_K: D1.K R6.2 | length 1.4
  L1 (Signal) w0.2: D1.K 117.462,65.812 117.462,67.162 R6.2
USB_D_N: J1.2 U1.32 | length 13.7
  L1 (Signal) w0.26: U1.32 103.734,79.588 103.815,79.507 114.595,79.507 114.6,79.512 115.535,79.512 115.678,79.368 116.797,79.368 J1.2
USB_D_P: J1.3 U1.33 | length 13.7
  L1 (Signal) w0.26: U1.33 103.57,80.088 103.607,80.051 103.926,80.051 104.007,79.97 114.403,79.97 114.408,79.975 115.727,79.975 115.87,79.832 116.797,79.832 J1.3
VBUS: C15.2 FB1.1 J1.1
XTAL_IN: C2.2 R7.2 X1.3 | length 2.3
  L1 (Signal) w0.2: R7.2 92.612,78.238 92.612,77.312 C2.2 92.6,76.625 93.05,76.175 X1.3
pads on no net: J1.4 J1.6 J1.7 J1.8 J1.9 J1.10 J1.11 J2.MH J3. U1.2 U1.3 U1.4 U1.10 U1.11 U1.12 U1.13 U1.18 U1.19 U1.20 U1.21 U1.25 U1.27 U1.28 U1.29 U1.30 U1.31 U1.38 U1.40 U1.41 U1.46 U3.2 U3.3 U3.4 U3.5 U3.6 U3.7 U3.14 U3.15 U3.16 U3.17 U3.19 U3.21 U3.22
copper on no net: | length 157.6
  L1 (Signal) w0.254: 79.875,57.67 ccw(c81.145,57.67) 81.145,56.4 118.413,56.4 119.88,56.4 ccw(c119.88,57.67) 121.15,57.67 121.15,93.85 ccw(c120.027,93.85) 120.027,94.973 82.345,94.973 81.42,94.973 81.145,94.973 ccw(c81.145,93.703) 79.875,93.703 79.875,57.67

## Polygon pours and split planes (outlines as drawn)
GND on L1 (Signal) "GND_L01_P016" (solid, pour order 16): 115.075,66.85 115.025,66.9 113.05,66.9 113.05,70.625 112.75,70.925 109.65,70.925 109.65,72.85 109.775,72.975 111.75,72.975 111.85,73.075 111.85,74.975 114.45,74.975 115.175,74.25 115.175,67.025 115.075,66.925
+3V3 on L1 (Signal) "+3V3_L01_P006" (solid, pour order 6): 109.85,70.4 109.85,68.375 109.925,68.3 109.925,66.225 114.925,66.225 115.2,65.95 115.1,65.85 115.1,64.4 113.5,64.4 111.8,62.7 111.8,62.075 107.3,62.075 106.975,62.4 106.975,64.1 108.1,65.225 108.1,70 108.5,70.4
+5 on L1 (Signal) "+5_L01_P005" (solid, pour order 5): 108.725,75.45 107.35,74.075 107.35,70.925 106.7,70.925 105.975,70.2 105.975,68.675 107.7,68.675 107.85,68.825 107.85,70.675 109.125,70.675 109.45,71 109.45,74.1 111.075,74.1 112.425,75.45
+5 on L1 (Signal) "+5_L01_P003" (solid, pour order 3): 113.025,77.85 113.025,75.475 113,75.45 111.85,75.45 111.85,77.8 111.9,77.85
VBUS on L1 (Signal) "VBUS_L01_P001" (solid, pour order 1): 116.9,78.9 116.875,78.875 113.325,78.875 113.325,75.45 113.275,75.4 114.525,75.4 114.525,78.2 114.675,78.35 117.95,78.35 117.95,79.025 117.8,78.875 116.325,78.875
GND on L3 (GND) "GND_L03_P013" (solid, pour order 13): 80.675,74.4 80.675,91.885 cw(c83.24,91.885) 83.24,94.45 117.76,94.45 cw(c117.76,91.885) 120.325,91.885 120.325,59.025 cw(c118.6,59.025) 118.6,57.3 80.75,57.3 cw(c80.75,57.35) 80.7,57.35 80.7,92.075
GND on L2 (GND) "GND_L02_P010" (solid, pour order 10): 80.65,91.81 cw(c83.215,91.81) 83.215,94.375 118.2,94.375 cw(c118.2,92.2) 120.375,92.2 120.375,58.9 cw(c118.75,58.9) 118.75,57.275 81.125,57.275 cw(c81.125,57.75) 80.65,57.75

## Other copper
L1 (Signal):
  drawing of 228 lines, arcs and shapes, not listed

## Silkscreen, mask and mechanical layers (free items; w line width, h text height)
Top Overlay:
  text "SWD" at 103.6,83.175 h1.5
  text "USB" at 116.329,73.479 h1.52
  text "GPIO" at 93.504,64.179 h1.52

## Text inside footprints (layer, text, board x,y; h text height)
D1: Top 3D Body "+" at 116.942,63.417 h0.5 r90
D2: Top 3D Body "+" at 103.442,77.033 h0.5